# Altium PCB Toilet Timer V100.PcbDoc
Units mil, origin at the board's own origin, x right, y up, seen from the top; angles counter-clockwise.
Board outline 2913.39 x 1338.58 mil, 2 copper layers (Top Layer, Bottom Layer); 59 components, 52 nets, 195 pads, 75 vias.
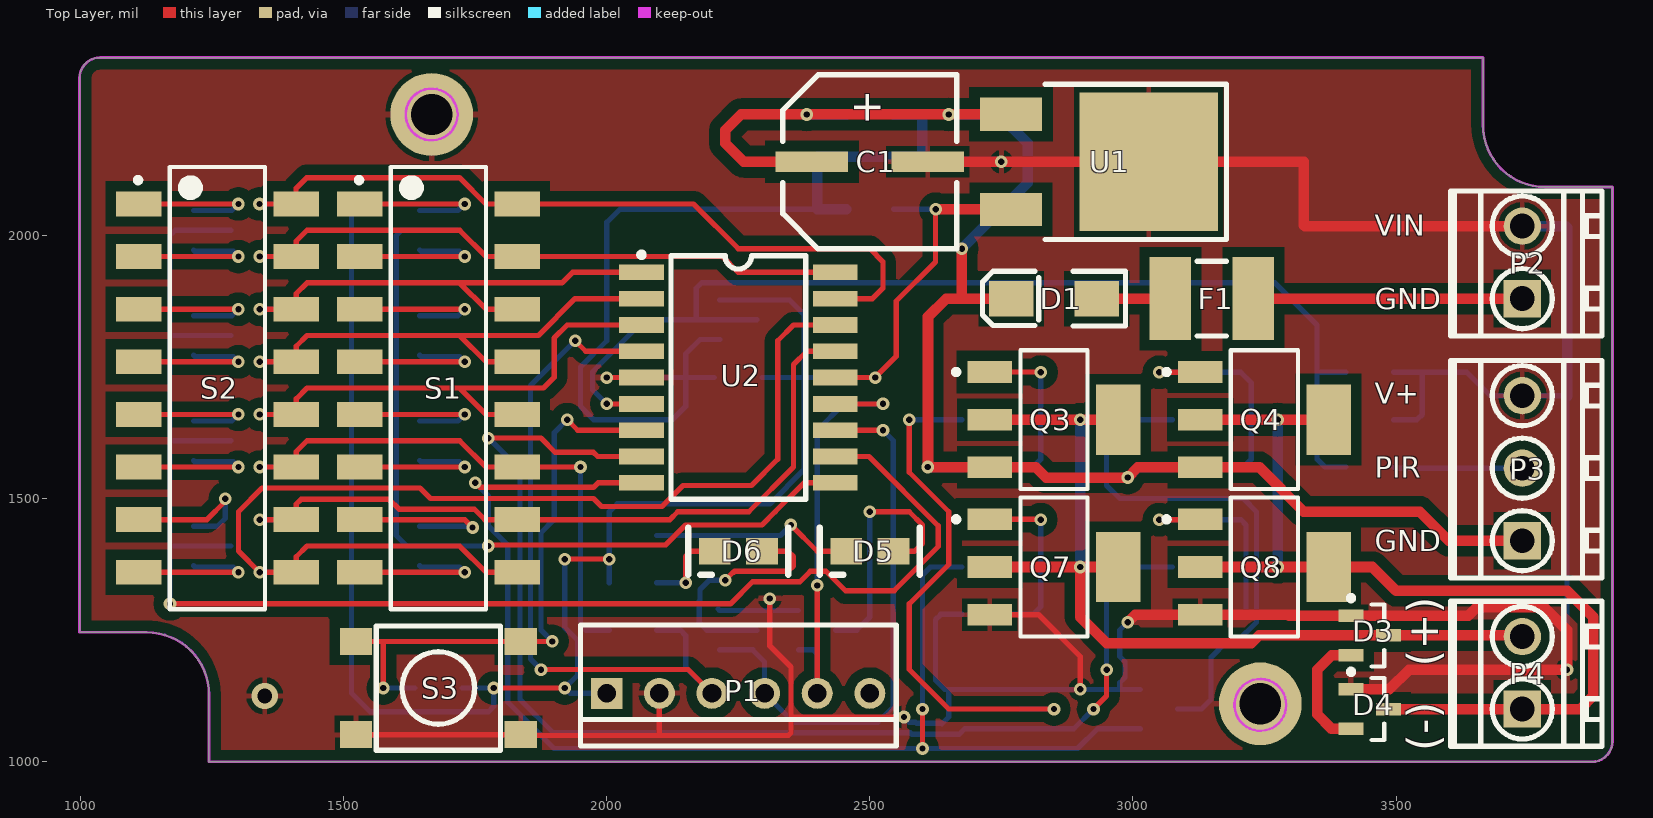
[diagram p0: Top Layer view]
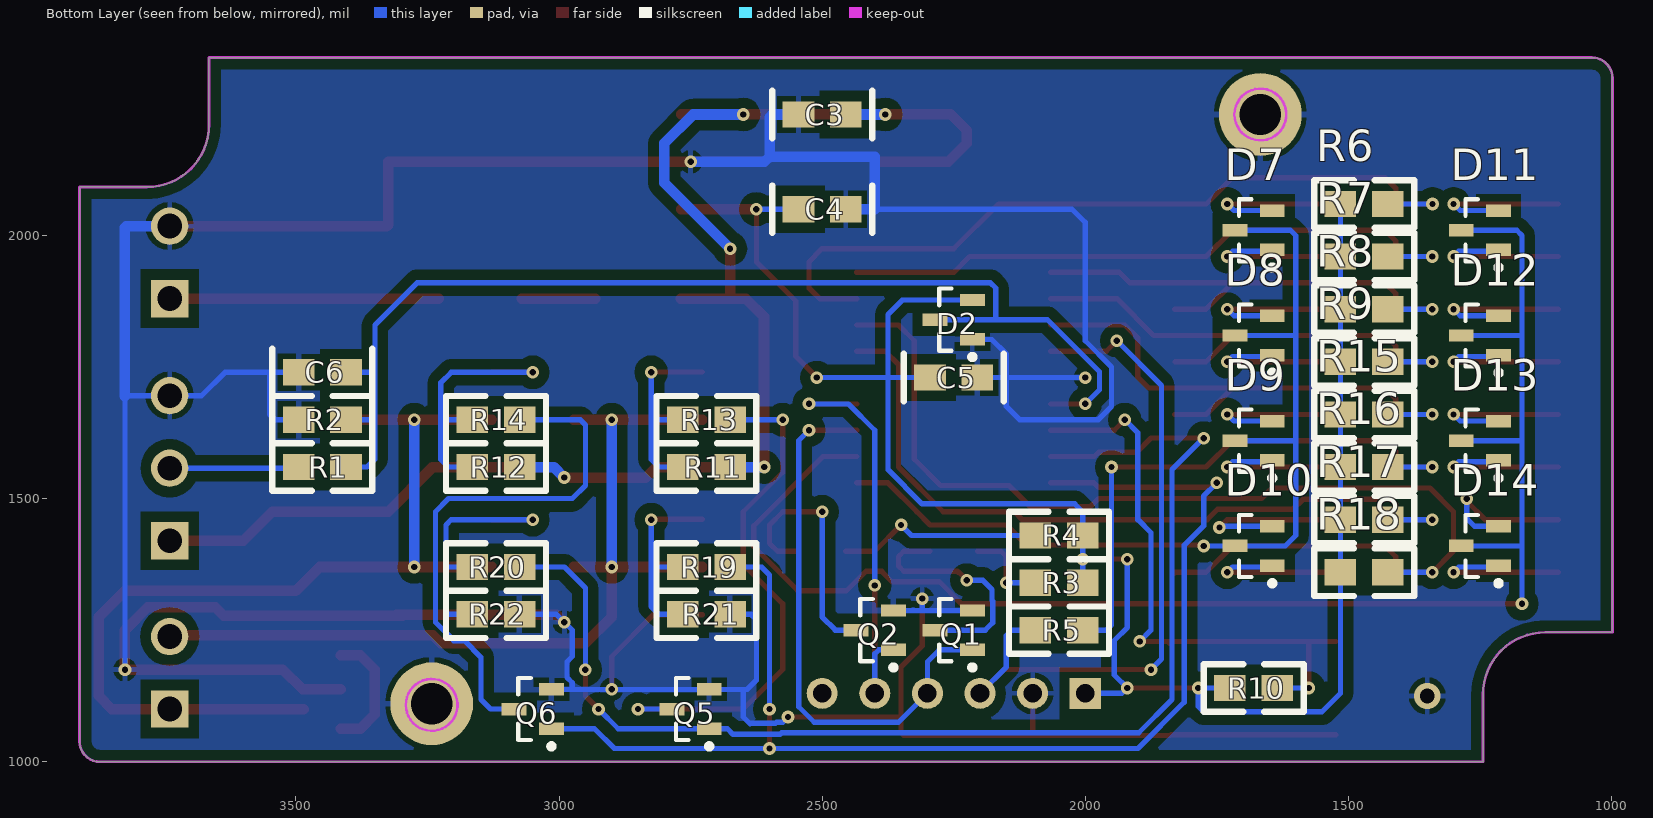
[diagram p1: Bottom Layer view, seen from below]

## Layer stack, top to bottom
Top Layer: signal copper 1.4
Dielectric: dielectric 12.6, FR-4, Dk 4.8
Bottom Layer: signal copper 1.4

## Board outline
998,1245.76 1125.96,1245.76 cw(c1125.96,1127.65) 1244.07,1127.65 1244.07,999.7 3872.02,999.7 ccw(c3872.02,1039.07) 3911.39,1039.07 3911.39,2092.22 3783.44,2092.22 cw(c3783.44,2210.33) 3665.33,2210.33 3665.33,2338.28 1037.37,2338.28 ccw(c1037.37,2298.91) 998,2298.91

## Design rules (kind name [scope] priority, off if disabled: settings)
Clearance Polygon [InPolygon vs not innet(GND)] p1: gap=20
Clearance [All] p2: gap=10
FabricationTestPointUsage TestPointUsage [All] p1: valid=0 allowmultiple=FALSE
FabricationTestpoint Testpoint [All] p1: side=3 testpointundercomponent=TRUE minsize=40 maxsize=100 preferedsize=60 minholesize=0 maxholesize=40 preferedholesize=32 testpointgrid=1 allowsidetop=TRUE allowsidebottom=TRUE usegrid=TRUE gridtolerance=0.01
PolygonConnect [All] p1: connectstyle=Relief reliefconductorwidth=10 reliefentries=4 polygonreliefangle="90 Angle"
RoomDefinition "Toilet Timer" [InComponentClass('Toilet Timer')] p1: confinementstyle=ConfineIn formatcopy=TRUE lockcomponents=FALSE outline 875,875 4050,875 4050,2475 875,2475
RoutingVias [All] p1: holewidth=12 width=24 viastyle="Through Hole" minholewidth=12 minwidth=24 maxholewidth=28 maxwidth=50
SilkscreenOverComponentPads [All] p1: minsilkscreentomaskgap=10
SolderMaskExpansion [All] p1: expansion=4
Width "Schematic Width Constraint_5" [InNet('V+')] p1: maxlimit=250 minlimit=20 preferedwidth=50
Width "Schematic Width Constraint_4" [InNet('V+')] p2: maxlimit=250 minlimit=20 preferedwidth=50
Width "Schematic Width Constraint_3" [InNet('NetD1_1')] p3: maxlimit=250 minlimit=20 preferedwidth=50
Width "Schematic Width Constraint_2" [InNet('NetF1_1')] p4: maxlimit=250 minlimit=20 preferedwidth=50
Width "Schematic Width Constraint_1" [InNet('LATCH-')] p5: maxlimit=250 minlimit=20 preferedwidth=50
Width "Schematic Width Constraint" [InNet('LATCH+')] p6: maxlimit=250 minlimit=20 preferedwidth=50
Width [All] p7: maxlimit=100 minlimit=8 preferedwidth=15
25 further rules are at their usual default settings.

## Components (designator, comment, footprint, x,y, rotation, side; value= is the part's Value field where it differs from the comment)
C1 "Cap Pol1" "CAP, SMD E CASE" 2500,2140 r270 top
C3 "Cap" "CAP(3D) - 0805" 2500,2230 r180 bottom
C4 "Cap" "CAP(3D) - 0805" 2500,2050 r0 bottom
C5 "Cap" "CAP(3D) - 0805" 2250,1730 r0 bottom
C6 "Cap" "CAP(3D) - 0805" 3450,1740 r180 bottom
D1 "S1M" DO-214AC 2850,1880 r180 top
D2 "BAV99" SOT23-3L 2250,1840 r0 bottom
D3 "BAV99" SOT23-3L 3450,1240 r0 top
D4 "BAV99" SOT23-3L 3450,1100 r0 top
D5 "RED" "LED(3D) RED - 0805" 2500,1400 r0 top
D6 "GREEN" "LED(3D) GREEN - 0805" 2250,1400 r0 top
D7 "BAV70" SOT23-3L 1680,2010 r0 bottom
D8 "BAV70" SOT23-3L 1680,1810 r0 bottom
D9 "BAV70" SOT23-3L 1680,1610 r0 bottom
D10 "BAV70" SOT23-3L 1680,1410 r0 bottom
D11 "BAV70" SOT23-3L 1250,2010 r0 bottom
D12 "BAV70" SOT23-3L 1250,1810 r0 bottom
D13 "BAV70" SOT23-3L 1250,1610 r0 bottom
D14 "BAV70" SOT23-3L 1250,1410 r0 bottom
F1 "RAYCHEM - MINISMDC050F-2" "miniSMD Polyswitch" 3150,1880 r180 top
P1 "Header 5" "TERMINAL-6 POL" 2000,1130 r0 top
P2 "POWER" "TYCO  1776112-2" 3740,1880 r90 top
P3 "PIR" "TYCO  1776112-3" 3740,1420 r90 top
P4 "VALVE" "TYCO  1776112-2" 3740,1100 r90 top
Q1 "MMUN2211LT1" SOT23-3L 2250,1250 r0 bottom
Q2 "MMUN2211LT1" SOT23-3L 2400,1250 r0 bottom
Q3 "FZT751" SOT223 2850,1650 r270 top
Q4 "FZT751" SOT223 3250,1650 r270 top
Q5 "MMUN2211LT1" SOT23-3L 2750,1100 r0 bottom
Q6 "MMUN2211LT1" SOT23-3L 3050,1100 r0 bottom
Q7 "FZT651" SOT223 2850,1370 r270 top
Q8 "FZT651" SOT223 3250,1370 r270 top
R1 "Res2" "RES(3D) - 0805" 3450,1560 r180 bottom
R2 "Res2" "RES(3D) - 0805" 3450,1650 r180 bottom
R3 "Res2" "RES(3D) - 0805" 2050,1340 r180 bottom
R4 "Res2" "RES(3D) - 0805" 2050,1430 r180 bottom
R5 "Res2" "RES(3D) - 0805" 2050,1250 r0 bottom
R6 "Res2" "RES(3D) - 0805" 1470,2060 r0 bottom
R7 "Res2" "RES(3D) - 0805" 1470,1960 r0 bottom
R8 "Res2" "RES(3D) - 0805" 1470,1860 r0 bottom
R9 "Res2" "RES(3D) - 0805" 1470,1760 r0 bottom
R10 "Res2" "RES(3D) - 0805" 1680,1140 r180 bottom
R11 "Res2" "RES(3D) - 0805" 2720,1560 r180 bottom
R12 "Res2" "RES(3D) - 0805" 3120,1560 r180 bottom
R13 "Res2" "RES(3D) - 0805" 2720,1650 r0 bottom
R14 "Res2" "RES(3D) - 0805" 3120,1650 r0 bottom
R15 "Res2" "RES(3D) - 0805" 1470,1660 r0 bottom
R16 "Res2" "RES(3D) - 0805" 1470,1560 r0 bottom
R17 "Res2" "RES(3D) - 0805" 1470,1460 r0 bottom
R18 "Res2" "RES(3D) - 0805" 1470,1360 r0 bottom
R19 "Res2" "RES(3D) - 0805" 2720,1370 r0 bottom
R20 "Res2" "RES(3D) - 0805" 3120,1370 r0 bottom
R21 "Res2" "RES(3D) - 0805" 2720,1280 r0 bottom
R22 "Res2" "RES(3D) - 0805" 3120,1280 r0 bottom
S1 "DELAY" S-DIP-16 1680,1710 r270 top
S2 "RUN" S-DIP-16 1260,1710 r270 top
S3 "SW-PB" "TACT 6MM" 1680,1140 r0 top
U1 "MC7805ACT" "7805 - DPAK" 3030,2140 r270 top
U2 "PIC16F627-04I/P" SOIC-18 2250,1730 r270 top

## Footprints (in the part's own frame and the unit in brackets; to place one, negate y for a bottom-side part, rotate by r counter-clockwise, add the part's x,y. Pads: shape width x height; smd on the part's side, far side on the other; paste and mask are expansions set on the pad)
"7805 - DPAK" [mm]
  rect 1.6x3 smd: 1(-2.3,-6.65) 3(2.3,-6.65)
  rect 6.7x6.7 smd: 2(0,0)
  silkscreen extent -3.75,-5 3.75,3.75, body extent -3,-7.75 3,2.5, height 2.4
"CAP(3D) - 0805" [mil]
  rect 60x50 smd: 1(-45,0) 2(45,0)
  silkscreen extent -95,-45 95,45, body extent -39,-25 39,25, height 22
"CAP, SMD E CASE" [mm]
  rect 1x3.5 smd: 1(0,-2.8) 2(0,2.8)
  silkscreen extent -4.2,-4.2 4.2,4.2, body extent -4.2,-4.2 4.2,4.2, height 6.35
DO-214AC [mil]
  rect 85x67 smd: 1(-81,0) 2(81,0)
  silkscreen extent -136,-52 136,52, body extent -79,-39 79,39, height 61
"LED(3D) GREEN - 0805" [mil]
  rect 60x50 smd: 1(-45,0) 2(45,0)
  silkscreen extent -95,-45 95,45, body extent -39,-25 39,25, height 22
"LED(3D) RED - 0805" [mil]
  rect 60x50 smd: 1(-45,0) 2(45,0)
  silkscreen extent -95,-45 95,45, body extent -39,-25 39,25, height 22
"miniSMD Polyswitch" [mm] "RAYCHEM - MINISMDC050F-2"
  rect 2x4 smd: 1(-2,0) 2(2,0)
  silkscreen extent -0.7,-1.8 0.7,1.8, body extent -2.4,-1.7 2.4,1.7, height 0.62
"RES(3D) - 0805" [mil]
  rect 60x50 smd: 1(-45,0) 2(45,0)
  silkscreen extent -95,-45 95,45, body extent -39,-25 39,25, height 22
S-DIP-16 [mm] "DIP; 16 Trim Leads; Row Spacing 7.62 mm; Pitch 2.54 mm"
  rect 1.2x2.2 smd: 1(-8.89,-3.8) 2(-6.35,-3.8) 3(-3.81,-3.8) 4(-1.27,-3.8) 5(1.27,-3.8) 6(3.81,-3.8) 7(6.35,-3.8) 8(8.89,-3.8) 9(8.89,3.8) 10(6.35,3.8) 11(3.81,3.8) 12(1.27,3.8) 13(-1.27,3.8) 14(-3.81,3.8) 15(-6.35,3.8) 16(-8.89,3.8)
  silkscreen extent -10.68,-3.95 10.68,2.3, body extent -10.75,-4 10.75,4, height 5
SOIC-18 [mil]
  rect 30x85 smd: 1(-200,-184.05) 2(-150,-184.05) 3(-100,-184.05) 4(-50,-184.05) 5(0,-184.05) 6(50,-184.05) 7(100,-184.05) 8(150,-184.05) 9(200,-184.05) 10(200,184.06) 11(150,184.06) 12(100,184.06) 13(50,184.06) 14(0,184.06) 15(-50,184.06) 16(-100,184.06) 17(-150,184.06) 18(-200,184.06)
  silkscreen extent -238,-189 231,128, body extent -236,-148 236,148, height 100
SOT23-3L [mm] "SOT23, 3-Leads, Body 2.9x1.3mm, Pitch 0.95mm, Lead Span 2.5mm, IPC High Density"
  rect 1.2x0.6 smd: 1(-0.9,0.95) 2(-0.9,-0.95) 3(0.9,0)
  silkscreen extent -1.02,-1.5 0.7,1.92, body extent -0.7,-1.5 0.7,1.5, height 1.1
SOT223 [mm] "SOT-223/SC-73; 4 Leads; Body 6.7 x 7.3 mm, inc. leads (LxW max)"
  rect 1.05x2.15 smd: 1(-2.3,-3.1) 2(0,-3.1) 3(2.3,-3.1)
  rect 3.4x2.15 smd: 4(0,3.1)
  silkscreen extent -3.35,-4.85 3.35,1.62, body extent -3.35,-1.62 3.35,1.63, height 1.1
"TACT 6MM" [mm]
  rect 1.55x1.3 smd: 1(-3.975,-2.25) 1(3.975,-2.25) 2(-3.975,2.25) 2(3.975,2.25)
  silkscreen extent -3,-3 3,3, body extent -3,-3 3,3, height 5
"TERMINAL-6 POL" [mm]
  rect 1.5x1.5 hole 0.9: 1(0,0)
  round 1.5 hole 0.9: 2(2.54,0) 3(5.08,0) 4(7.62,0) 5(10.16,0) 6(12.7,0)
  silkscreen extent -1.27,-2.54 13.97,3.3, body extent -1.25,-3.19 13.99,3.28, height 9.99
"TYCO  1776112-2" [mm] "3.5mm Pitch Low Profile Connector (2 Way)"
  rect 1.8x1.8 hole 1.2: 1(0,0)
  round 1.8 hole 1.2: 2(3.5,0)
  silkscreen extent -1.8,-3.85 5.2,3.45, body extent -1.77,-3.88 5.23,3.42, height 8.55
"TYCO  1776112-3" [mm] "3.5mm Pitch Low Profile Connector (3 Way)"
  rect 1.8x1.8 hole 1.2: 1(0,0)
  round 1.8 hole 1.2: 2(3.5,0) 3(7,0)
  silkscreen extent -1.8,-3.85 8.7,3.45, body extent -1.8,-3.8 8.7,3.5, height 8.55

## Part data
C1: "Polarized Capacitor (Radial)"
C3 C4 C5 C6: "Capacitor"
D1: library part DIODE, "DIODE, POWER"
D2 D3: library part "Diode 1N914", "High Conductance Fast Diode"
D4 D5 D6: library part LED0, "Typical INFRARED GaAs LED"
D7 D8 D9 D10 D11 D12 D13 D14: "DUAL DIODE, BAV99"
F1: library part POLYSWITCH
P1: "Header, 5-Pin"
P2 P4: library part "Header 2", "Header, 2-Pin"
P3: library part "Header 3", "Header, 3-Pin"
Q1 Q2 Q5 Q6: library part "NPN DIGITAL TRANSISTOR"
Q3 Q4: library part PNP, "PNP Bipolar Transistor"
Q7 Q8: library part NPN, "NPN Bipolar Transistor"
R1 R2 R3 R4 R5 R6 R7 R8 R9 R10 R11 R12 R13 R14 R15 R16 R17 R18 R19 R20 R21 R22: "Resistor"
S1 S2: library part "SW DIP-8", "DIP Switch, 8 Position, SPST"
S3: "Switch"
U1: "3-Terminal Positive Fixed Voltage Regulator"
U2: "FLASH-Based 8-Bit CMOS Microcontroller, 1K (x14-Bit words) FLASH, 224 Bytes RAM, 4 MHz, 18-Pin PDIP, 3.0 to 5.5V Supply Range, Industrial Temperature"

## Free pads (board coordinates)
  round 157.48 hole 78.74: 0(1667.3,2230) 0(3242.1,1110)

## Via types
v1: diameter 24, hole 12, Top Layer to Bottom Layer, 74 vias
v2: diameter 50, hole 28, Top Layer to Bottom Layer, 1 vias

## Nets (pads, with @x,y where several pads share a name; then routed paths per layer and width w, separated by ;. In a path a pad name is that pad's centre, name@x,y a point inside that pad or via, vN(x,y) a via of type N, cw(c..) or ccw(c..) an arc to the next point about the centre after c; other vN are vias at no path point)
D0: R6.1 S1.16 S2.16 U2.17 | length 1524.3
  Top Layer w10: v1(1340,2060) S2.16 ; S2.16@1410,2060 S2.16 ; S1.16@1830,2060 S1.16 ; U2.17 2505,1880 2525,1900 2525,1950 2500,1975 2250,1975 2165,2060 S1.16 ; S2.16 1409.61,2089.61 1430,2110 1720,2110 1770,2060 S1.16
  Bottom Layer w10: v1(1340,2060) R6.1
D1: R7.1 S1.15 S2.15 U2.18 | length 1279.9
  Top Layer w10: v1(1340.39,1960) S2.15@1410,1960 ; S2.15@1410.39,1960 S2.15@1410,1960 ; U2.18 2250,1930 2220,1960 S1.15 1770.39,1960 1720.39,2010 1430.39,2010 1410,1989.61 ; S2.15@1410,1960 1410,1989.61 ; S2.15@1410,1960 1410,1989.61
  Bottom Layer w10: v1(1340.39,1960) R7.1@1425.39,1960
D2: R8.1 S1.14 S2.14 U2.1 | length 1017.6
  Top Layer w10: v1(1340.39,1860) S2.14@1410,1860 ; S2.14@1410.39,1860 S2.14@1410,1860 ; S1.14@1830.39,1860 S1.14 1770.39,1860 1720.39,1910 ; U2.1 1935,1930 1915,1910 1720.39,1910 ; S2.14@1410,1860 1410,1889.61 ; S2.14@1410,1860 1410,1889.61 ; 1410,1889.61 1430.39,1910 1720.39,1910
  Bottom Layer w10: v1(1340.39,1860) R8.1@1425.39,1860
D3: R9.1 S1.13 S2.13 U2.2 | length 1067.7
  Top Layer w10: v1(1340.39,1760) S2.13 ; S2.13@1410,1760 1410,1789.61 1430.39,1810 1720.39,1810 ; S1.13 1770.39,1760 1720.39,1810 ; 2005,1880 U2.2 1940,1880 1870,1810 1830,1810 1720.39,1810
  Bottom Layer w10: v1(1340.39,1760) R9.1
D4: R15.1 S1.12 S2.12 U2.3 | length 1073.3
  Top Layer w10: v1(1340.39,1660) S2.12 S2.12@1410,1660 ; S2.12@1410.39,1660 S2.12@1410,1660 ; S1.12@1830.39,1660 S1.12 1770.39,1660 1720.39,1710 ; U2.3 1925,1830 1900,1805 1900,1775 1900,1730 1880,1710 1720.39,1710 ; S2.12@1410,1660 1410,1689.61 1430.39,1710 1720.39,1710
  Bottom Layer w10: v1(1340.39,1660) R15.1 R15.1@1425.39,1660
D5: R5.1 R16.1 S1.11 S2.11 | length 1143.3
  Top Layer w10: v1(1340.39,1560) S2.11@1410,1560 ; S2.11@1410.39,1560 S2.11@1410,1560 ; S1.11@1830.39,1560 S1.11 ; v1(1950,1560) S1.11 ; S2.11@1410,1560 1410,1589.61 ; S2.11@1410,1560 1410,1589.61 ; 1410,1589.61 1430.39,1610 1720.39,1610 1770.39,1560 S1.11
  Bottom Layer w10: v1(1340.39,1560) R16.1@1425.39,1560 ; v1(1950,1560) 1950,1260 1960,1250 R5.1
D6: R17.1 S1.10 S2.10 U2.15 | length 1476.1
  Top Layer w10: v1(1340.39,1460) S2.10 ; S2.10@1410.39,1460 1410,1460 S2.10 ; S1.10@1830.39,1460 S1.10 ; U2.15 2380,1780 2355,1755 2355,1560 2270,1475 2135,1475 2120,1460 1992,1460 S1.10 ; S2.10 1410,1460.39 1410,1489.61 1419.02,1498.62 1586.38,1498.62 1605,1480 1748.18,1480 1768.18,1460 S1.10
  Bottom Layer w10: v1(1340.39,1460) R17.1 R17.1@1425.39,1460
D7: R18.1 S1.9 S2.9 U2.16 | length 2210.2
  Top Layer w10: S1.9@1830.39,1360 S1.9 ; S1.9@1831.61,1358 S1.9 ; U2.16 2355,1830 2325,1800 2325,1575 2275,1525 2145,1525 2105,1485 1990,1485 1975,1500 1665,1500 1645,1520 1345,1520 1300,1475 1300,1400.39 v1(1340.39,1360) S2.9 1410,1360 1410,1389.61 1430.39,1410 1720.39,1410 1770.39,1360 S1.9
  Bottom Layer w10: v1(1340.39,1360) R18.1 R18.1@1425.39,1360
DIP0: D7.3 D8.3 D9.3 D10.3 U2.10 | length 1812.5
  Top Layer w10: v1(1775,1410) 1777,1412 2077,1412 2112,1412 2150,1450 2295,1450 2320,1475 2375,1530 U2.10
  Bottom Layer w10: D9.3 1600,1610 ; D8.3 1600,1810 ; D7.3 1610,2010 1600,2000 1600,1810 ; v1(1775,1410) D10.3 1620,1410 1600,1430 1600,1515 1600,1610 ; 1600,1610 1600,1810
DIP1: D11.3 D12.3 D13.3 D14.3 U2.11 | length 2991.6
  Top Layer w10: v1(1170,1300) 2235,1300 2277,1342 2367,1342 2387,1362 2416.79,1362 2453.79,1325 2546.21,1325 2630,1408.79 2630,1448.28 2498.28,1580 U2.11
  Bottom Layer w10: v1(1170,1300) 1170,1410 ; D14.3 1170,1410 ; D13.3 1170,1610 ; D12.3 1170,1810 ; D11.3 1180,2010 1170,2000 1170,1810 ; 1170,1410 1170,1610 ; 1170,1610 1170,1810
GND: C1.2 C3.1 C4.1 C5.1 C6.1 D2.1 D3.1 D4.1 P1.2 P2.2 P3.3 pad.0 Q1.2 Q2.2 Q5.2 Q6.2 Q7.3 Q8.3 R2.1 R21.1 R22.1 S3.1 U1.2 U2.5 | length 8975.3
  Top Layer w10: S3.1@1523.5,1051.42 1836.5,1051.42 1837.91,1050 2100,1050 ; v1(2000,1730) U2.5 ; P1.2 2100,1050 ; v1(2310,1310) 2310,1220 2350,1180 2350,1085 ; v1(2565,1085) 2350,1085 ; Q7.3 2820.55,1279.45 2900,1200 v1(2900,1137.4) ; 2100,1050 2345,1050 2350,1055 2350,1085
  Top Layer w20: C1.2 v1(2750,2140) U1.2 3325,2140 3325,2020 3327.2,2017.8 3385,2017.8 P2.2 ; v1(2990,1265) 3004.45,1279.45 Q8.3 3295,1279.45 ; 3309.45,1279.45 3295,1279.45 ; D4.1 3487.4,1137.4 3525,1175 v1(3825,1175) 3825,1250 3781.77,1293.23 3653.23,1293.23 3637.4,1277.4 D3.1 3297.05,1277.4 3295,1279.45
  Bottom Layer w10: v1(2000,1730) 2150,1730 ; C5.1 2150,1730 ; Q1.2@2211.97,1290 Q1.2 ; D2.1 2177.6,1802.6 2150,1775 2150,1730 ; 2262.4,1287.4 Q1.2 ; 2310,1287.4 v1(2310,1310) ; Q2.2 Q1.2 ; 2400,2050 2025,2050 2000,2025 2000,1800 1950,1750 1950,1675 1975,1650 2125,1650 2150,1675 2150,1730 ; v1(2565,1085) 2575,1075 2586.82,1075 2588.82,1073 2636,1073 2637,1072 2650,1085 2650,1137.4 ; 2670,1137.4 2675,1137.4 ; R21.1 2635,1280 2625,1270 2625,1155 2642.6,1137.4 2650,1137.4 ; Q6.2 2975,1137.4 ; R22.1 3005,1280 2975,1250 2975,1200 2985,1190 2985,1160 2975,1150 2975,1137.4 ; R2.1 3540,1650 3550,1660 3550,1740 ; C6.1 3550,1740 ; 3824.41,1695.59 P3.3 3679.41,1695.59 3635,1740 3550,1740 ; v1(3825,1175) 3825,1695 ; 2650,1137.4 2675,1137.4 ; 2675,1137.4 Q5.2 2975,1137.4
  Bottom Layer w20: C4.1 2400,2050 2400,2150 2600,2150 ; C3.1 2595,2230 2600,2225 2600,2150 ; v1(2750,2140) 2610,2140 2600,2150 ; P2.2 3822.2,2017.8 3825,2015 3825,1695
  other v2: 1350,1125
LATCH+: D3.3 P4.2 Q3.2 Q3.4 Q7.2 Q7.4 | length 1731
  Top Layer w20: Q7.2 Q7.4 ; Q3.2 v1(2900,1650) Q3.4 ; v1(2900,1370) 2900,1275 2950,1225 3225,1225 3240,1240 D3.3 3737.8,1240 P4.2
  Bottom Layer w20: v1(2900,1370) v1(2900,1650)
LATCH-: D4.3 P4.1 Q4.2 Q4.4 Q8.2 Q8.4 | length 1860.4
  Top Layer w20: Q8.2 v1(3275,1370) Q8.4 3455,1370 3500,1325 3800,1325 3825,1325 3875,1275 3875,1125 3850,1100 P4.1 D4.3 ; Q4.2 v1(3275,1650) Q4.4
  Bottom Layer w20: v1(3275,1370) v1(3275,1650)
NetD1_1: D1.1 F1.2 | length 140.3
  Top Layer w20: D1.1 F1.2
NetD5_1: D5.1 R4.1 | length 417.3
  Top Layer w10: 2370,1430 v1(2350,1450) 2400,1400 D5.1
  Bottom Layer w10: R4.1 2330,1430 v1(2350,1450)
NetD5_2: D5.2 Q2.3 | length 481.5
  Top Layer w10: v1(2500,1475) 2575,1475 2600,1450 2600,1415 2585,1400 D5.2
  Bottom Layer w10: Q2.3 2475,1250 2500,1275 v1(2500,1475)
NetD6_1: D6.1 R3.1 | length 164.1
  Top Layer w10: v1(2150,1340) 2150,1390 2160,1400 D6.1
  Bottom Layer w10: R3.1 v1(2150,1340)
NetD6_2: D6.2 Q1.3 | length 457.5
  Top Layer w10: v1(2225,1345) 2240,1360 2241.21,1360 2243.21,1362 2345,1362 2355,1372 2355,1390 2345,1400 D6.2
  Bottom Layer w10: v1(2225,1345) 2195,1345 2177,1327 2177,1306.48 2175.94,1305.43 2175.94,1264.06 2190,1250 Q1.3
NetD7_1: D7.1 S1.2 | length 290.3
  Top Layer w10: S1.2 v1(1730,1960)
  Bottom Layer w10: D7.1 1647.16,1970 1720,1970 v1(1730,1960)
NetD7_2: D7.2 S1.1 | length 290.3
  Top Layer w10: S1.1 v1(1730,2060)
  Bottom Layer w10: D7.2 1717.4,2047.4 v1(1730,2060)
NetD8_1: D8.1 S1.4 | length 290.3
  Top Layer w10: S1.4 v1(1730,1760)
  Bottom Layer w10: D8.1 1647.16,1770 1720,1770 v1(1730,1760)
NetD8_2: D8.2 S1.3 | length 290.3
  Top Layer w10: S1.3 v1(1730,1860)
  Bottom Layer w10: D8.2 1717.4,1847.4 v1(1730,1860)
NetD9_1: D9.1 S1.6 | length 290.3
  Top Layer w10: S1.6 v1(1730,1560)
  Bottom Layer w10: D9.1 1647.16,1570 1720,1570 v1(1730,1560)
NetD9_2: D9.2 S1.5 | length 290.3
  Top Layer w10: S1.5 v1(1730,1660)
  Bottom Layer w10: D9.2 1717.4,1647.4 v1(1730,1660)
NetD10_1: D10.1 S1.8 | length 290.3
  Top Layer w10: S1.8 v1(1730,1360)
  Bottom Layer w10: D10.1 1647.16,1370 1720,1370 v1(1730,1360)
NetD10_2: D10.2 S1.7 | length 357.2
  Top Layer w10: S1.7 1730,1460 ; 1695,1460 1730,1460 ; v1(1745,1445) 1730,1460
  Bottom Layer w10: D10.2 1685,1447.4 1742.6,1447.4 v1(1745,1445)
NetD11_1: D11.1 S2.2 | length 290.3
  Top Layer w10: S2.2@1100.39,1960 v1(1300,1960)
  Bottom Layer w10: D11.1 1217.16,1970 1290,1970 v1(1300,1960)
NetD11_2: D11.2 S2.1 | length 290.3
  Top Layer w10: S2.1@1100.39,2060 v1(1300,2060)
  Bottom Layer w10: D11.2 1287.4,2047.4 v1(1300,2060)
NetD12_1: D12.1 S2.4 | length 290.3
  Top Layer w10: S2.4@1100.39,1760 v1(1300,1760)
  Bottom Layer w10: D12.1 1217.16,1770 1290,1770 v1(1300,1760)
NetD12_2: D12.2 S2.3 | length 290.3
  Top Layer w10: S2.3@1100.39,1860 v1(1300,1860)
  Bottom Layer w10: D12.2 1287.4,1847.4 v1(1300,1860)
NetD13_1: D13.1 S2.6 | length 290.3
  Top Layer w10: S2.6@1100.39,1560 v1(1300,1560)
  Bottom Layer w10: D13.1 1217.16,1570 1290,1570 v1(1300,1560)
NetD13_2: D13.2 S2.5 | length 290.3
  Top Layer w10: S2.5@1100.39,1660 v1(1300,1660)
  Bottom Layer w10: D13.2 1287.4,1647.4 v1(1300,1660)
NetD14_1: D14.1 S2.8 | length 290.3
  Top Layer w10: S2.8@1100.39,1360 v1(1300,1360)
  Bottom Layer w10: D14.1 1217.16,1370 1290,1370 v1(1300,1360)
NetD14_2: D14.2 S2.7 | length 298.3
  Top Layer w10: S2.7@1100.39,1460 S2.7 1240,1460 1275,1495 v1(1275,1500)
  Bottom Layer w10: D14.2 1260,1447.4 1275,1462.4 v1(1275,1500)
NetF1_1: F1.1 P2.1 | length 511.3
  Top Layer w20: F1.1 P2.1
NetP3_2: P3.2 R1.1 | length 245.9
  Bottom Layer w10: R1.1 3497.2,1557.8 P3.2
NetQ3_1: Q3.1 R11.1 R13.2 | length 388.5
  Top Layer w10: Q3.1 2824.45,1740.55 v1(2825,1740)
  Bottom Layer w10: R11.1 2810,1560 2825,1575 2825,1650 ; R13.2 2825,1650 ; v1(2825,1740) 2825,1650
NetQ4_1: Q4.1 R12.1 R14.2 | length 531.9
  Top Layer w10: v1(3050,1740) Q4.1@3127.4,1740
  Bottom Layer w10: v1(3050,1740) 3205,1740 3225,1720 3225,1650 ; R12.1 3210,1560 3225,1575 3225,1650 ; R14.2 3225,1650
NetQ5_3: Q5.3 R13.1 | length 1032.8
  Top Layer w10: 2575,1600 2575,1625 ; v1(2575,1650) 2575,1625 ; v1(2850,1100) 2650,1100 2575,1175 2575,1300 2650,1375 2650,1475 2575,1550 2575,1625
  Bottom Layer w10: v1(2575,1650) 2625,1650 R13.1 ; Q5.3 v1(2850,1100)
NetQ6_3: Q6.3 R14.1 | length 1024.6
  Bottom Layer w10: R14.1 2960,1650 2950,1640 2950,1525 2975,1500 3210,1500 3235,1475 3235,1265 3200,1230 3180,1230 3148.36,1198.36 3148.36,1118.36 3130,1100 Q6.3
NetQ7_1: Q7.1 R19.2 R21.2 | length 388.5
  Top Layer w10: Q7.1 2824.45,1460.55 v1(2825,1460)
  Bottom Layer w10: R21.2 2810,1280 2825,1295 2825,1370 ; R19.2 2825,1370 ; v1(2825,1460) 2825,1370
NetQ8_1: Q8.1 R20.2 R22.2 | length 513.6
  Top Layer w10: v1(3050,1460) Q8.1@3127.4,1460
  Bottom Layer w10: v1(3050,1460) 3190,1460 3205,1460 3215,1450 3215,1370 ; R22.2 3210,1280 3215,1285 3215,1370 ; R20.2 3215,1370
OFF: Q6.1 R19.1 U2.9 | length 2431.6
  Top Layer w10: v1(1750,1530) 1758.62,1521.38 1975,1521.38 1983.62,1530 U2.9 ; v1(2600,1025) v1(2600,1100)
  Bottom Layer w10: v1(1750,1530) 1775,1505 1775,1490 1775,1448.18 1812,1411.18 1812,1113 1900,1025 v1(2600,1025) 2895,1025 2932.6,1062.6 Q6.1 ; v1(2600,1100) 2600,1355 2615,1370 R19.1
ON: Q5.1 R20.1 U2.8 | length 2361.3
  Top Layer w10: v1(1775,1615) 1800,1615 1875,1615 1902.11,1587.89 1975,1587.89 1982.89,1580 U2.8 ; v1(2925,1100) 2950,1125 v1(2950,1175)
  Bottom Layer w10: v1(1775,1615) 1835,1555 1835,1118.28 1898.28,1055 2225,1055 ; 2240,1055 2225,1055 ; v1(2925,1100) 2887.6,1062.6 Q5.1 2680,1062.6 2669.4,1052 2580,1052 2577,1055 2525,1055 2225,1055 ; v1(2950,1175) 2950,1330 2990,1370 R20.1
PGC: P1.4 Q1.1 U2.12 | length 1058.8
  Top Layer w10: U2.12 v1(2525,1630)
  Bottom Layer w10: Q1.1 2277.4,1212.6 2300,1190 P1.4 2355,1075 2515,1075 2544.53,1104.53 2544.53,1610.47 v1(2525,1630)
PGD: P1.5 Q2.1 U2.13 | length 850.2
  Top Layer w10: P1.5 v1(2400,1335) ; U2.13 v1(2525,1680)
  Bottom Layer w10: Q2.1 2392.4,1212.6 2400,1205 P1.5 ; v1(2400,1335) 2400,1630 2450,1680 v1(2525,1680)
PIR: C6.2 D2.3 R1.2 R2.2 U2.6 | length 2195.2
  Top Layer w10: v1(2000,1680) U2.6
  Bottom Layer w10: v1(2000,1680) 1973,1707 1973,1741.18 2071.82,1840 2170,1840 ; D2.3 2180,1840 2170,1840 ; R1.2 3365,1560 3350,1575 3350,1650 ; R2.2 3350,1650 ; C6.2 3350,1740 ; 2170,1840 2170,1900 2180,1910 3270,1910 3350,1830 3350,1740 ; 3350,1650 3350,1740
SW0: R10.2 S3.2 U2.7 | length 1202.7
  Top Layer w10: S3.2@1523.5,1228.58 1575,1228.58 ; v1(1575,1140) 1575,1228.58 ; S3.2@1840.08,1225 S3.2@1836.5,1228.58 ; v1(1896.42,1228.58) S3.2@1836.5,1228.58 ; v1(1925,1650) 1945,1630 U2.7 1990,1630 ; 1575,1228.58 S3.2@1836.5,1228.58
  Bottom Layer w10: v1(1575,1140) R10.2 ; v1(1896.42,1228.58) 1875,1250 1875,1435 1900,1460 1900,1625 v1(1925,1650)
V+: C1.1 C3.2 D1.2 P3.1 Q3.3 Q4.3 R11.2 R12.2 U1.1 | length 3175.1
  Top Layer w20: C1.1 2260,2140 2225,2175 2225,2200 2255.55,2230.55 U1.1 ; v1(2675,1975) 2675,1880 ; D1.2 2675,1880 ; P3.1 3600,1420 3545,1475 3325,1475 3240.55,1559.45 Q4.3 3009.45,1559.45 v1(2990,1540) 2835,1540 2815.55,1559.45 Q3.3 2610.55,1559.45 2610.55,1845.55 2645,1880 2675,1880
  Bottom Layer w20: v1(2380,2230) C3.2 ; v1(2610,1560) R11.2 ; v1(2650,2230) 2745,2230 2800,2175 2800,2100 v1(2675,1975) ; v1(2990,1540) 3010,1560 R12.2
VCC: C4.2 C5.2 D2.2 P1.1 R3.2 R4.2 R6.2 R7.2 R8.2 R9.2 R10.1 R15.2 R16.2 R17.2 R18.2 U1.3 U2.14 | length 3770.4
  Top Layer w10: v1(1785,1140) v1(1920,1140) ; v1(1920,1385) v1(2005,1385) ; U2.14 v1(2510,1730) 2550,1770 2550,1875 2625,1950 v1(2625,2050) ; U1.3@2767.64,2050 U1.3
  Top Layer w20: v1(2625,2050) U1.3@2767.64,2050
  Bottom Layer w10: R6.2 R7.2 R8.2 R9.2 R15.2 R16.2 R17.2 R18.2 1515,1130 1550,1095 1775,1095 1785,1105 v1(1785,1140) R10.1 ; v1(1920,1385) 1920,1255 1945,1230 1945,1165 v1(1920,1140) 1930,1130 P1.1 ; R3.2 v1(2005,1385) R4.2 2005,1475 2020,1490 2310,1490 2375,1555 2375,1730 ; D2.2 2347.6,1877.4 2375,1850 2375,1730 ; C5.2 2375,1730 ; v1(2510,1730) 2375,1730 ; C4.2 v1(2625,2050)
VOUT: D3.2 D4.2 | length 236.9
  Top Layer w20: D4.2 3377.4,1062.6 3350,1090 3350,1175 3377.6,1202.6 D3.2
VPP: P1.3 R5.2 U2.4 | length 1336.2
  Top Layer w10: v1(1875,1175) 2155,1175 P1.3 ; v1(1940,1800) 1960,1780 U2.4
  Bottom Layer w10: v1(1875,1175) 1855,1195 1855,1715 v1(1940,1800) ; R5.2 2140,1250 2150,1240 2150,1180 P1.3
pads on no net: P1.6

## Polygon pours and split planes (outlines as drawn)
GND on Top Layer "GND" (solid, remove dead copper, pour order 1000): 1000,1000 1000,2350 3925,2350 3925,1000 1000,1000
GND on Bottom Layer "GND" (solid, remove dead copper, pour order 1001): 1000,1000 1000,2350 3925,2350 3925,1000 1000,1000

## Keep-outs
Keep-Out Layer:
  circle w5: c3242.1,1107.97 r49.21
  circle w5: c1667.3,2230.01 r49.21
  lines w5: 998,1245.76 1125.96,1245.76 cw(c1125.96,1127.65) 1244.07,1127.65 1244.07,999.7 3872.02,999.7 ccw(c3872.02,1039.07) 3911.39,1039.07 3911.39,2092.22 3783.44,2092.22 cw(c3783.44,2210.33) 3665.33,2210.33 3665.33,2338.28 1037.37,2338.28 ccw(c1037.37,2298.91) 998,2298.91 998,1245.76

## Silkscreen, mask and mechanical layers (free items; w line width, h text height)
Top Overlay:
  text "VIN" at 3460,2000 h40
  text "GND" at 3460,1860 h40
  text "V+" at 3460,1680 h40
  text "PIR" at 3460,1540 h40
  text "GND" at 3460,1400 h40
  text "(+)" at 3580,1180 h60 r90
  text "(-)" at 3580,1020 h60 r90
Mechanical 1:
  circle w5: c1667.3,2230.01 r49.21
  circle w5: c3242.1,1107.97 r49.21
  lines w5: 998,1245.76 998,2298.91 cw(c1037.37,2298.91) 1037.37,2338.28 3665.33,2338.28 3665.33,2210.33 ccw(c3783.44,2210.33) 3783.44,2092.22 3911.39,2092.22 3911.39,1039.07 cw(c3872.02,1039.07) 3872.02,999.7 1244.07,999.7 1244.07,1127.65 ccw(c1125.96,1127.65) 1125.96,1245.76 998,1245.76
  text "HAMMOND 1551K" at 925,750 h60
Mechanical 3:
  lines w5: 1125.96,1272.01 1125.96,1127.65 1270.31,1127.65 ; 1591.84,2230.01 1742.75,2230.01 ; 1667.3,2154.55 1667.3,2305.47 ; 3166.64,1107.97 3317.56,1107.97 ; 3242.1,1032.51 3242.1,1183.43 ; 3639.08,2210.33 3783.44,2210.33 3783.44,2065.97

## Text inside footprints (layer, text, board x,y; h text height)
C1: Top Overlay "+" at 2470.47,2276.81 h59.06 r270